# Altium PCB Microphone-Boards_V1.0.PcbDoc (part 2 of 2)
Units mm, origin at the board's own origin, x right, y up, seen from the top; angles counter-clockwise.
Board outline 112 x 88 mm, 2 copper layers (Top Layer, Bottom Layer), stack 1.548 mm thick; 320 components, 194 nets, 1232 pads, 0 vias.
Unrouted connection lines stored in the file: 718.
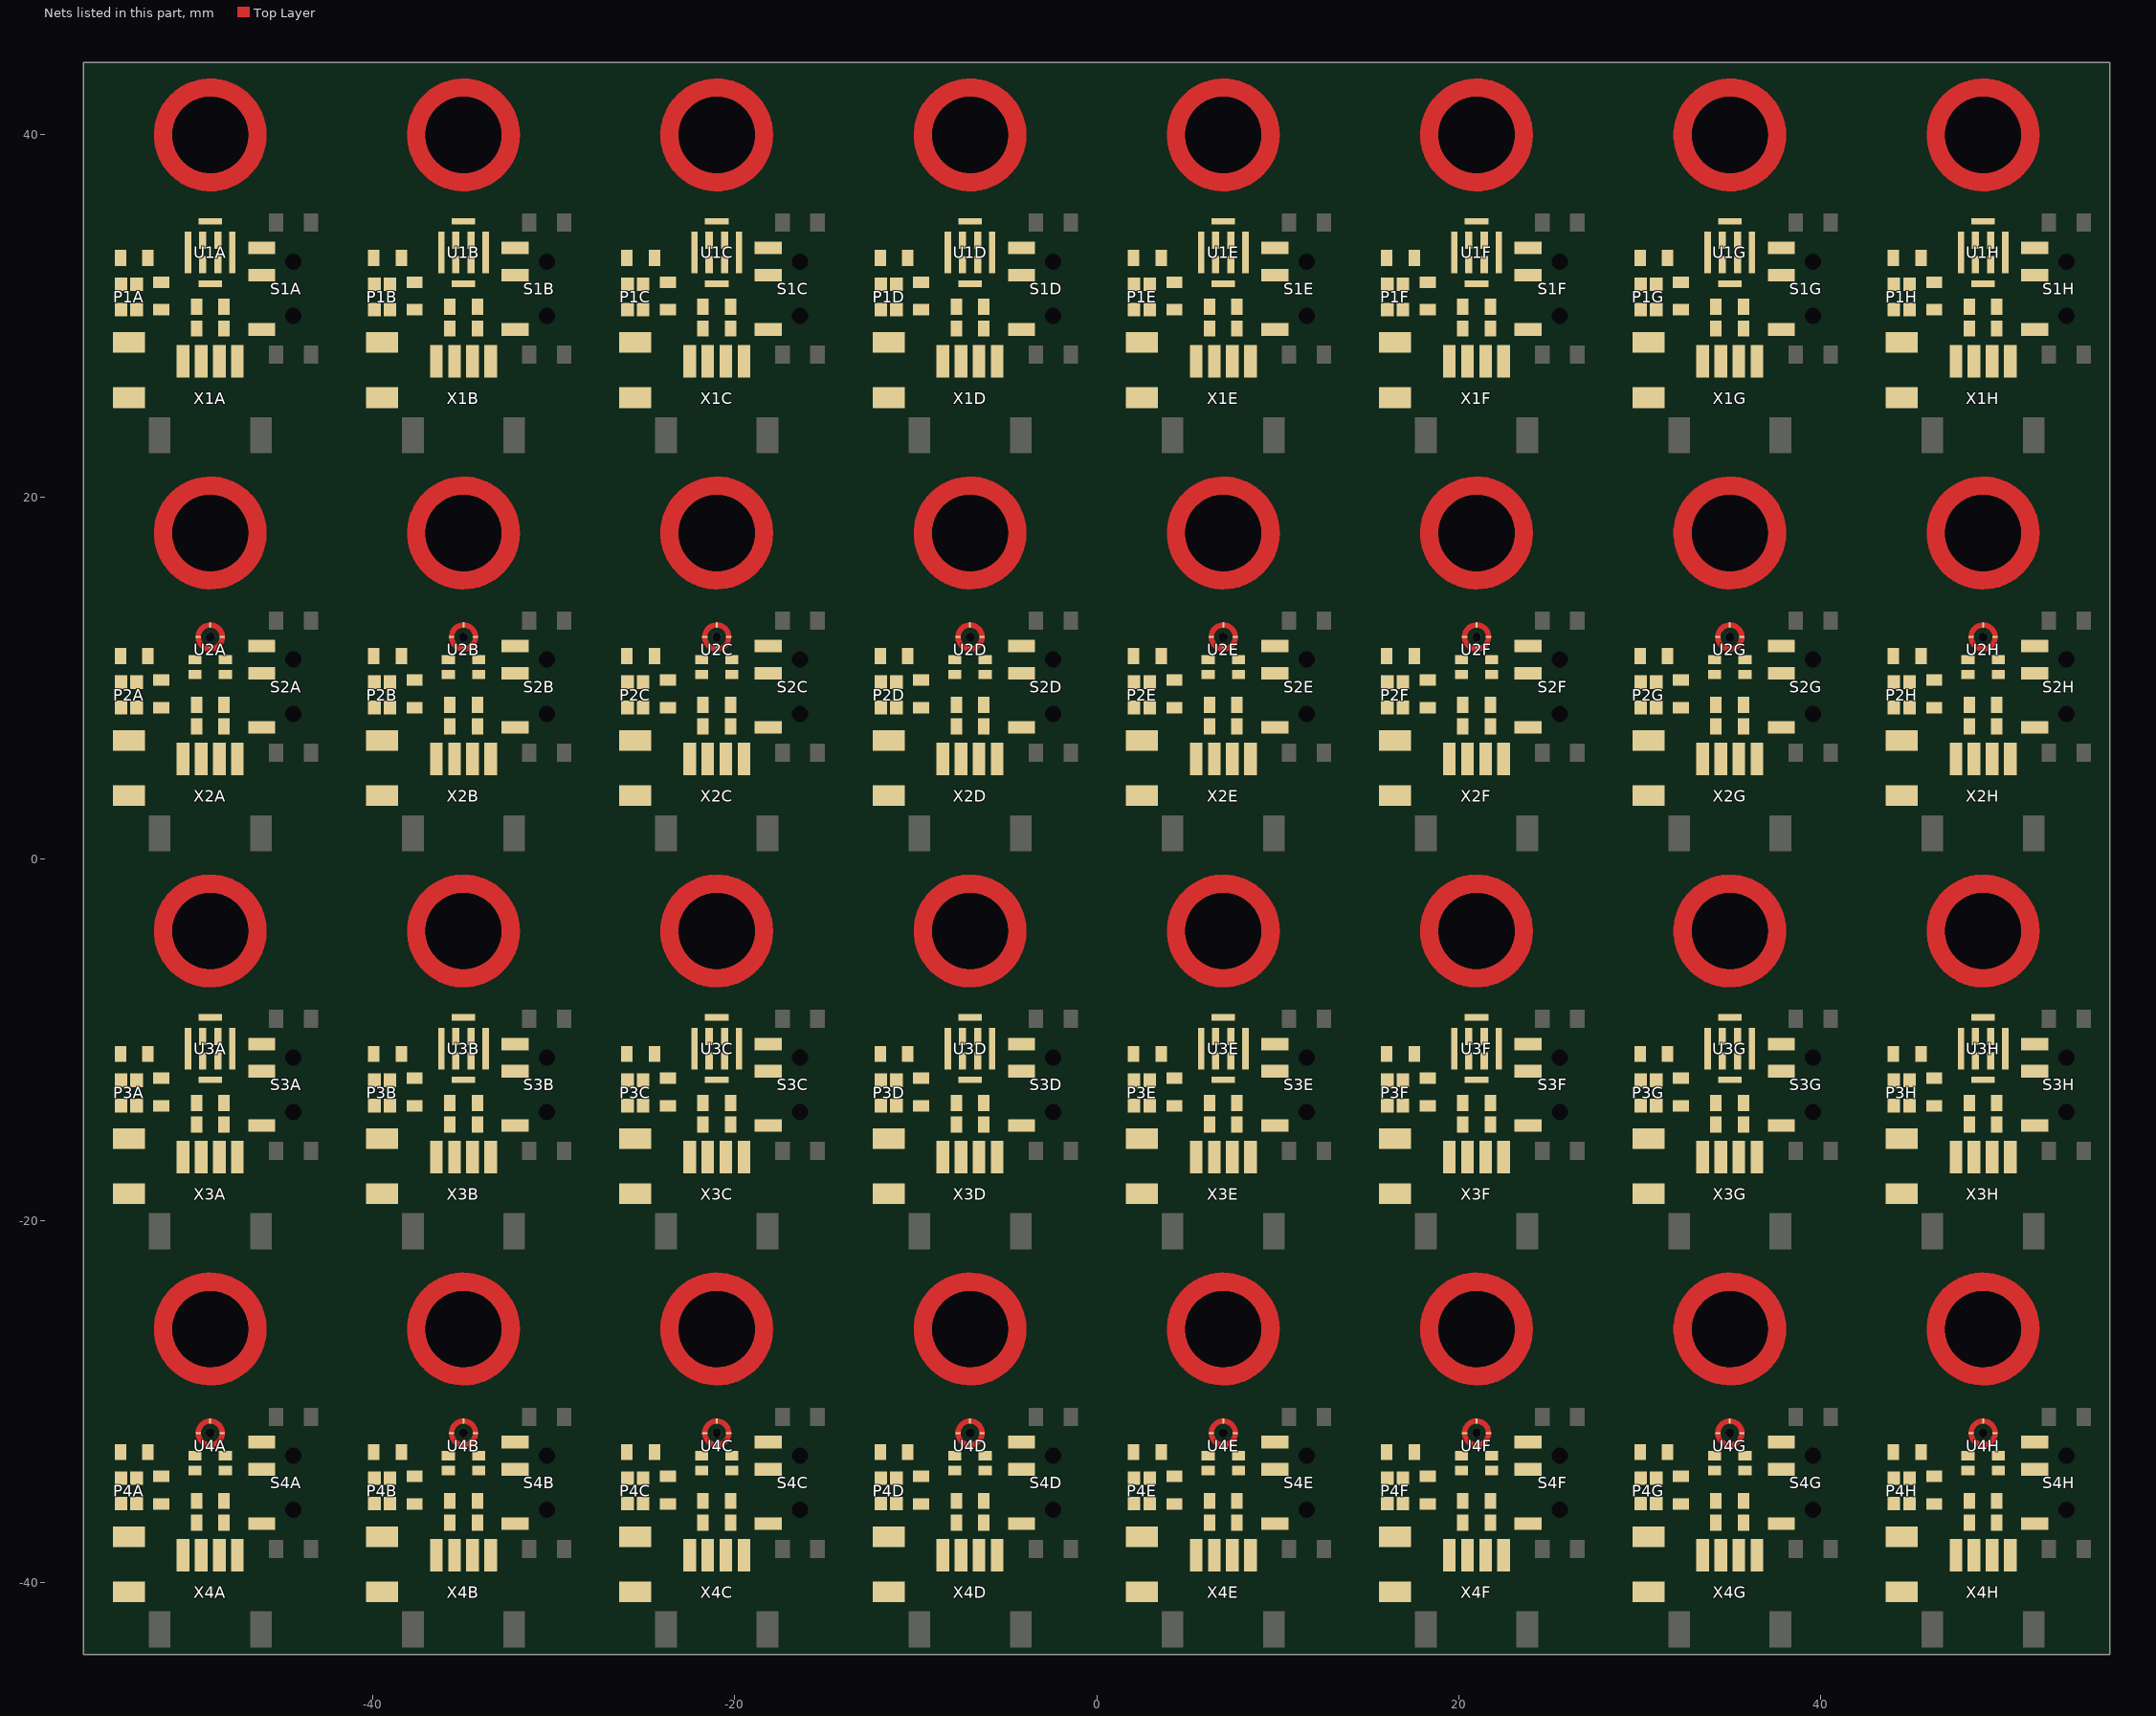
[diagram p2: the nets of this part, all layers, seen from the top]

## Part data
C1A C1B C1C C1D C1E C1F C1G C1H C4A C4B C4C C4D C4E C4F C4G C4H C7A C7B C7C C7D C7E C7F C7G C7H C10A C10B C10C C10D C10E C10F C10G C10H: library part C-CAPACITOR, "CAP-MK", Component Value="10nF 50V", JLC-Parts=C57112, Component Description="Multilayer Ceramic Capacitors", Digikey=445-5662-1-ND, Farnell=2346966, Mouser=77-VJ0603V103ZXAPBC, Unit Price=0.01
C2A C2B C2C C2D C2E C2F C2G C2H C5A C5B C5C C5D C5E C5F C5G C5H C8A C8B C8C C8D C8E C8F C8G C8H C11A C11B C11C C11D C11E C11F C11G C11H: library part "E6 - 100nF", "SMD Ceramic Capacitor E6", Component Value="100nF 50V", JLC-Parts=C14663, Component Description="Multilayer Ceramic Capacitors MLCC", ComponentLink1Description=Datasheet, ComponentLink1URL=https://datasheet.lcsc.com/lcsc/1809301912_YAGEO-CC0603KRX7R9BB104_C14663.pdf, Digikey=445-6899-1-ND, Farnell=2210822, Mouser=810-CGA2B3X7R1H104K, Unit Price=0.01
C3A C3B C3C C3D C3E C3F C3G C3H C6A C6B C6C C6D C6E C6F C6G C6H C9A C9B C9C C9D C9E C9F C9G C9H C12A C12B C12C C12D C12E C12F C12G C12H: library part "E6 - 10uF", "SMD Ceramic Capacitor E6", Component Value="10µF 50V", JLC-Parts=C13585, Component Description="Multilayer Ceramic Capacitors MLCC", ComponentLink1Description=Datasheet, ComponentLink1URL=https://datasheet.lcsc.com/lcsc/1810191219_Samsung-Electro-Mechanics-CL10A106KP8NNNC_C19702.pdf, Digikey=587-3258-1-ND, Farnell=2113070, Mouser=963-LMK107BBJ106MALT, Unit Price=0.01
M1A M1B M1C M1D M1E M1F M1G M1H M2A M2B M2C M2D M2E M2F M2G M2H M3A M3B M3C M3D M3E M3F M3G M3H M4A M4B M4C M4D M4E M4F M4G M4H: library part M-Spacer_M3_3mm, "Solderable Standoff Nut", Component Value="M3 3mm", JLC-Parts=C2915308, Component Description="Solderable Standoff Nut", ComponentLink1Description=Datasheet, ComponentLink1URL=https://datasheet.lcsc.com/lcsc/2112061830_Sinhoo-SMTSO3030CTJ_C2915308.pdf, Mouser=153-SMTSO-M3-3ET, Unit Price=0.05
P1A P1B P1C P1D P1E P1F P1G P1H P2A P2B P2C P2D P2E P2F P2G P2H P3A P3B P3C P3D P3E P3F P3G P3H P4A P4B P4C P4D P4E P4F P4G P4H: library part P-XL-1615SURUWC, "LED Red/White", JLC-Parts=C965837, Component Description="LED Red/White", Component Value=XL-1615SURUWC, ComponentLink1Description=Datasheet, ComponentLink1URL=https://datasheet.lcsc.com/lcsc/2211030000_XINGLIGHT-XL-1615SURUWC_C965837.pdf, Unit Price=0.02
R1A R1B R1C R1D R1E R1F R1G R1H R3A R3B R3C R3D R3E R3F R3G R3H R5A R5B R5C R5D R5E R5F R5G R5H R7A R7B R7C R7D R7E R7F R7G R7H: library part R-RESISTOR, "SMD-Widerstand 1/4W", Component Value="390 (75V, 100mW, 1%)", JLC-Parts=C23151, Component Description="Thick Film Chip Resistor", Digikey=P390HCT-ND, Farnell=2303111, Mouser=667-ERJ-3EKF3900V, Unit Price=0.06
R2A R2B R2C R2D R2E R2F R2G R2H R4A R4B R4C R4D R4E R4F R4G R4H R6A R6B R6C R6D R6E R6F R6G R6H R8A R8B R8C R8D R8E R8F R8G R8H: library part R-RESISTOR, "SMD-Widerstand 1/4W", Component Value="820 (75V, 100mW, 1%)", JLC-Parts=C23253, Component Description="Thick Film Chip Resistor", Digikey=P820HCT-ND, Farnell=2303136, Mouser=667-ERJ-3EKF8200V, Unit Price=0.06
S1A S1B S1C S1D S1E S1F S1G S1H S2A S2B S2C S2D S2E S2F S2G S2H S3A S3B S3C S3D S3E S3F S3G S3H S4A S4B S4C S4D S4E S4F S4G S4H: library part S-PCM12SMTR, "Miniature Slide Switch", Component Value="PCM12SMTR (SPDT)", JLC-Parts=C431540, aliExpress=33002042977, Component Description="Miniature Slide Switch", ComponentLink1Description=Datasheet, ComponentLink1URL=https://datasheet.lcsc.com/lcsc/1912111437_SHOU-HAN-MSK12C02_C431540.pdf, Digikey=401-2016-1-ND, Farnell=9575146, Mouser=611-PCM12SMTR, Unit Price=0.04
U1A U1B U1C U1D U1E U1F U1G U1H: library part U-MP34DT05TR-A, "Digital PDM MEMS Microphone (Top Port)", JLC-Parts=C2688664, Component Description="Digital PDM MEMS Microphone (Top Port)", Component Value=MP34DT05TR-A, ComponentLink1Description=Datasheet, ComponentLink1URL=https://datasheet.lcsc.com/lcsc/2106070037_STMicroelectronics-MP34DT05TR-A_C2688664.pdf, Digikey=497-17809-1-ND, Farnell=2851942, Mouser=511-MP34DT05TR-A, Unit Price=1.50
U2A U2B U2C U2D U2E U2F U2G U2H: library part U-GMA3526H10-B26, "Digital PDM MEMS Microphone (Bottom Port)", JLC-Parts=C498192, Component Description="Digital PDM MEMS Microphone (Bottom Port)", Component Value=GMA3526H10-B26, ComponentLink1Description=Datasheet, ComponentLink1URL=https://datasheet.lcsc.com/lcsc/2004081814_INGHAi-GMA3526H10-B26_C498192.pdf, Digikey=423-1402-1-ND, Mouser=721-SPH0641LU4H-1, Unit Price=1.06
U3A U3B U3C U3D U3E U3F U3G U3H: library part U-GMA4030H11-F26, "Digital PDM MEMS Microphone (Top Port)", JLC-Parts=C498193, Component Description="Digital PDM MEMS Microphone (Top Port)", Component Value=GMA4030H11-F26, ComponentLink1Description=Datasheet, ComponentLink1URL=https://datasheet.lcsc.com/lcsc/2005071903_INGHAi-GMA4030H11-F26_C498193.pdf, Digikey=423-1210-1-ND, Mouser=721-SPK0415HM4H-B-7, Unit Price=1.11
U4A U4B U4C U4D U4E U4F U4G U4H: library part U-SD18OB261-060, "Digital PDM MEMS Microphone (Bottom Port)", JLC-Parts=C2895290, Component Description="Digital PDM MEMS Microphone (Bottom Port)", Component Value=SD18OB261-060, ComponentLink1Description=Datasheet, ComponentLink1URL=https://datasheet.lcsc.com/lcsc/2208241200_Goertek-SD18OB261-060_C2895290.pdf, Digikey=4719-SD18OB261-050DKR-ND, Unit Price=0.61
X1A X1B X1C X1D X1E X1F X1G X1H X2A X2B X2C X2D X2E X2F X2G X2H X3A X3B X3C X3D X3E X3F X3G X3H X4A X4B X4C X4D X4E X4F X4G X4H: library part "X-Stiftleiste (4-Fach)", "Wire To Board Connector (1x4P 1.0mm)", JLC-Parts=C2905006, Component Description="Wire To Board Connector (1x4P 1.0mm)", Component Value=1.0-4PWB, ComponentLink1Description=Datasheet, ComponentLink1URL=https://datasheet.lcsc.com/lcsc/2111080930_DEALON-1-0-4PWB_C2905006.pdf, Digikey=455-SM04B-SRSS-TBCT-ND, Farnell=1830839, Unit Price=0.03

## Nets (pads, with @x,y where several pads share a name; then routed paths per layer and width w, separated by ;. In a path a pad name is that pad's centre, name@x,y a point inside that pad or via, vN(x,y) a via of type N, cw(c..) or ccw(c..) an arc to the next point about the centre after c; other vN are vias at no path point)
3V3: C1A.2 C1B.2 C1C.2 C1D.2 C1E.2 C1F.2 C1G.2 C1H.2 C2A.2 C2B.2 C2C.2 C2D.2 C2E.2 C2F.2 C2G.2 C2H.2 C3A.2 C3B.2 C3C.2 C3D.2 C3E.2 C3F.2 C3G.2 C3H.2 C4A.2 C4B.2 C4C.2 C4D.2 C4E.2 C4F.2 C4G.2 C4H.2 C5A.2 C5B.2 C5C.2 C5D.2 C5E.2 C5F.2 C5G.2 C5H.2 C6A.2 C6B.2 C6C.2 C6D.2 C6E.2 C6F.2 C6G.2 C6H.2 C7A.2 C7B.2 C7C.2 C7D.2 C7E.2 C7F.2 C7G.2 C7H.2 C8A.2 C8B.2 C8C.2 C8D.2 C8E.2 C8F.2 C8G.2 C8H.2 C9A.2 C9B.2 C9C.2 C9D.2 C9E.2 C9F.2 C9G.2 C9H.2 C10A.2 C10B.2 C10C.2 C10D.2 C10E.2 C10F.2 C10G.2 C10H.2 C11A.2 C11B.2 C11C.2 C11D.2 C11E.2 C11F.2 C11G.2 C11H.2 C12A.2 C12B.2 C12C.2 C12D.2 C12E.2 C12F.2 C12G.2 C12H.2 P1A.4 P1B.4 P1C.4 P1D.4 P1E.4 P1F.4 P1G.4 P1H.4 P2A.4 P2B.4 P2C.4 P2D.4 P2E.4 P2F.4 P2G.4 P2H.4 P3A.4 P3B.4 P3C.4 P3D.4 P3E.4 P3F.4 P3G.4 P3H.4 P4A.4 P4B.4 P4C.4 P4D.4 P4E.4 P4F.4 P4G.4 P4H.4 S1A.1 S1B.1 S1C.1 S1D.1 S1E.1 S1F.1 S1G.1 S1H.1 S2A.1 S2B.1 S2C.1 S2D.1 S2E.1 S2F.1 S2G.1 S2H.1 S3A.1 S3B.1 S3C.1 S3D.1 S3E.1 S3F.1 S3G.1 S3H.1 S4A.1 S4B.1 S4C.1 S4D.1 S4E.1 S4F.1 S4G.1 S4H.1 U1A.1 U1B.1 U1C.1 U1D.1 U1E.1 U1F.1 U1G.1 U1H.1 U2A.5 U2B.5 U2C.5 U2D.5 U2E.5 U2F.5 U2G.5 U2H.5 U3A.1 U3B.1 U3C.1 U3D.1 U3E.1 U3F.1 U3G.1 U3H.1 U4A.5 U4B.5 U4C.5 U4D.5 U4E.5 U4F.5 U4G.5 U4H.5 X1A.2 X1B.2 X1C.2 X1D.2 X1E.2 X1F.2 X1G.2 X1H.2 X2A.2 X2B.2 X2C.2 X2D.2 X2E.2 X2F.2 X2G.2 X2H.2 X3A.2 X3B.2 X3C.2 X3D.2 X3E.2 X3F.2 X3G.2 X3H.2 X4A.2 X4B.2 X4C.2 X4D.2 X4E.2 X4F.2 X4G.2 X4H.2
GND: C1A.1 C1B.1 C1C.1 C1D.1 C1E.1 C1F.1 C1G.1 C1H.1 C2A.1 C2B.1 C2C.1 C2D.1 C2E.1 C2F.1 C2G.1 C2H.1 C3A.1 C3B.1 C3C.1 C3D.1 C3E.1 C3F.1 C3G.1 C3H.1 C4A.1 C4B.1 C4C.1 C4D.1 C4E.1 C4F.1 C4G.1 C4H.1 C5A.1 C5B.1 C5C.1 C5D.1 C5E.1 C5F.1 C5G.1 C5H.1 C6A.1 C6B.1 C6C.1 C6D.1 C6E.1 C6F.1 C6G.1 C6H.1 C7A.1 C7B.1 C7C.1 C7D.1 C7E.1 C7F.1 C7G.1 C7H.1 C8A.1 C8B.1 C8C.1 C8D.1 C8E.1 C8F.1 C8G.1 C8H.1 C9A.1 C9B.1 C9C.1 C9D.1 C9E.1 C9F.1 C9G.1 C9H.1 C10A.1 C10B.1 C10C.1 C10D.1 C10E.1 C10F.1 C10G.1 C10H.1 C11A.1 C11B.1 C11C.1 C11D.1 C11E.1 C11F.1 C11G.1 C11H.1 C12A.1 C12B.1 C12C.1 C12D.1 C12E.1 C12F.1 C12G.1 C12H.1 P1A.1 P1B.1 P1C.1 P1D.1 P1E.1 P1F.1 P1G.1 P1H.1 P2A.1 P2B.1 P2C.1 P2D.1 P2E.1 P2F.1 P2G.1 P2H.1 P3A.1 P3B.1 P3C.1 P3D.1 P3E.1 P3F.1 P3G.1 P3H.1 P4A.1 P4B.1 P4C.1 P4D.1 P4E.1 P4F.1 P4G.1 P4H.1 S1A.3 S1B.3 S1C.3 S1D.3 S1E.3 S1F.3 S1G.3 S1H.3 S2A.3 S2B.3 S2C.3 S2D.3 S2E.3 S2F.3 S2G.3 S2H.3 S3A.3 S3B.3 S3C.3 S3D.3 S3E.3 S3F.3 S3G.3 S3H.3 S4A.3 S4B.3 S4C.3 S4D.3 S4E.3 S4F.3 S4G.3 S4H.3 U1A.5 U1B.5 U1C.5 U1D.5 U1E.5 U1F.5 U1G.5 U1H.5 U2A.3 U2B.3 U2C.3 U2D.3 U2E.3 U2F.3 U2G.3 U2H.3 U3A.5 U3B.5 U3C.5 U3D.5 U3E.5 U3F.5 U3G.5 U3H.5 U4A.3 U4B.3 U4C.3 U4D.3 U4E.3 U4F.3 U4G.3 U4H.3 X1A.1 X1B.1 X1C.1 X1D.1 X1E.1 X1F.1 X1G.1 X1H.1 X2A.1 X2B.1 X2C.1 X2D.1 X2E.1 X2F.1 X2G.1 X2H.1 X3A.1 X3B.1 X3C.1 X3D.1 X3E.1 X3F.1 X3G.1 X3H.1 X4A.1 X4B.1 X4C.1 X4D.1 X4E.1 X4F.1 X4G.1 X4H.1
NetM1A_1: M1A.1
NetM1B_1: M1B.1
NetM1C_1: M1C.1
NetM1D_1: M1D.1
NetM1E_1: M1E.1
NetM1F_1: M1F.1
NetM1G_1: M1G.1
NetM1H_1: M1H.1
NetM2A_1: M2A.1
NetM2B_1: M2B.1
NetM2C_1: M2C.1
NetM2D_1: M2D.1
NetM2E_1: M2E.1
NetM2F_1: M2F.1
NetM2G_1: M2G.1
NetM2H_1: M2H.1
NetM3A_1: M3A.1
NetM3B_1: M3B.1
NetM3C_1: M3C.1
NetM3D_1: M3D.1
NetM3E_1: M3E.1
NetM3F_1: M3F.1
NetM3G_1: M3G.1
NetM3H_1: M3H.1
NetM4A_1: M4A.1
NetM4B_1: M4B.1
NetM4C_1: M4C.1
NetM4D_1: M4D.1
NetM4E_1: M4E.1
NetM4F_1: M4F.1
NetM4G_1: M4G.1
NetM4H_1: M4H.1
NetP1A_2: P1A.2 R2A.2
NetP1A_3: P1A.3 R1A.2
NetP1B_2: P1B.2 R2B.2
NetP1B_3: P1B.3 R1B.2
NetP1C_2: P1C.2 R2C.2
NetP1C_3: P1C.3 R1C.2
NetP1D_2: P1D.2 R2D.2
NetP1D_3: P1D.3 R1D.2
NetP1E_2: P1E.2 R2E.2
NetP1E_3: P1E.3 R1E.2
NetP1F_2: P1F.2 R2F.2
NetP1F_3: P1F.3 R1F.2
NetP1G_2: P1G.2 R2G.2
NetP1G_3: P1G.3 R1G.2
NetP1H_2: P1H.2 R2H.2
NetP1H_3: P1H.3 R1H.2
NetP2A_2: P2A.2 R4A.2
NetP2A_3: P2A.3 R3A.2
NetP2B_2: P2B.2 R4B.2
NetP2B_3: P2B.3 R3B.2
NetP2C_2: P2C.2 R4C.2
NetP2C_3: P2C.3 R3C.2
NetP2D_2: P2D.2 R4D.2
NetP2D_3: P2D.3 R3D.2
NetP2E_2: P2E.2 R4E.2
NetP2E_3: P2E.3 R3E.2
NetP2F_2: P2F.2 R4F.2
NetP2F_3: P2F.3 R3F.2
NetP2G_2: P2G.2 R4G.2
NetP2G_3: P2G.3 R3G.2
NetP2H_2: P2H.2 R4H.2
NetP2H_3: P2H.3 R3H.2
NetP3A_2: P3A.2 R6A.2
NetP3A_3: P3A.3 R5A.2
NetP3B_2: P3B.2 R6B.2
NetP3B_3: P3B.3 R5B.2
NetP3C_2: P3C.2 R6C.2
NetP3C_3: P3C.3 R5C.2
NetP3D_2: P3D.2 R6D.2
NetP3D_3: P3D.3 R5D.2
NetP3E_2: P3E.2 R6E.2
NetP3E_3: P3E.3 R5E.2
NetP3F_2: P3F.2 R6F.2
NetP3F_3: P3F.3 R5F.2
NetP3G_2: P3G.2 R6G.2
NetP3G_3: P3G.3 R5G.2
NetP3H_2: P3H.2 R6H.2
NetP3H_3: P3H.3 R5H.2
NetP4A_2: P4A.2 R8A.2
NetP4A_3: P4A.3 R7A.2
NetP4B_2: P4B.2 R8B.2
NetP4B_3: P4B.3 R7B.2
NetP4C_2: P4C.2 R8C.2
NetP4C_3: P4C.3 R7C.2
NetP4D_2: P4D.2 R8D.2
NetP4D_3: P4D.3 R7D.2
NetP4E_2: P4E.2 R8E.2
NetP4E_3: P4E.3 R7E.2
NetP4F_2: P4F.2 R8F.2
NetP4F_3: P4F.3 R7F.2
NetP4G_2: P4G.2 R8G.2
NetP4G_3: P4G.3 R7G.2
NetP4H_2: P4H.2 R8H.2
NetP4H_3: P4H.3 R7H.2
NetR1A_1: R1A.1 R2A.1 S1A.2 U1A.2
NetR1B_1: R1B.1 R2B.1 S1B.2 U1B.2
NetR1C_1: R1C.1 R2C.1 S1C.2 U1C.2
NetR1D_1: R1D.1 R2D.1 S1D.2 U1D.2
NetR1E_1: R1E.1 R2E.1 S1E.2 U1E.2
NetR1F_1: R1F.1 R2F.1 S1F.2 U1F.2
NetR1G_1: R1G.1 R2G.1 S1G.2 U1G.2
NetR1H_1: R1H.1 R2H.1 S1H.2 U1H.2
NetR3A_1: R3A.1 R4A.1 S2A.2 U2A.2
NetR3B_1: R3B.1 R4B.1 S2B.2 U2B.2
NetR3C_1: R3C.1 R4C.1 S2C.2 U2C.2
NetR3D_1: R3D.1 R4D.1 S2D.2 U2D.2
NetR3E_1: R3E.1 R4E.1 S2E.2 U2E.2
NetR3F_1: R3F.1 R4F.1 S2F.2 U2F.2
NetR3G_1: R3G.1 R4G.1 S2G.2 U2G.2
NetR3H_1: R3H.1 R4H.1 S2H.2 U2H.2
NetR5A_1: R5A.1 R6A.1 S3A.2 U3A.2
NetR5B_1: R5B.1 R6B.1 S3B.2 U3B.2
NetR5C_1: R5C.1 R6C.1 S3C.2 U3C.2
NetR5D_1: R5D.1 R6D.1 S3D.2 U3D.2
NetR5E_1: R5E.1 R6E.1 S3E.2 U3E.2
NetR5F_1: R5F.1 R6F.1 S3F.2 U3F.2
NetR5G_1: R5G.1 R6G.1 S3G.2 U3G.2
NetR5H_1: R5H.1 R6H.1 S3H.2 U3H.2
NetR7A_1: R7A.1 R8A.1 S4A.2 U4A.2
NetR7B_1: R7B.1 R8B.1 S4B.2 U4B.2
NetR7C_1: R7C.1 R8C.1 S4C.2 U4C.2
NetR7D_1: R7D.1 R8D.1 S4D.2 U4D.2
NetR7E_1: R7E.1 R8E.1 S4E.2 U4E.2
NetR7F_1: R7F.1 R8F.1 S4F.2 U4F.2
NetR7G_1: R7G.1 R8G.1 S4G.2 U4G.2
NetR7H_1: R7H.1 R8H.1 S4H.2 U4H.2
NetU1A_3: U1A.3 X1A.4
NetU1A_4: U1A.4 X1A.3
NetU1B_3: U1B.3 X1B.4
NetU1B_4: U1B.4 X1B.3
NetU1C_3: U1C.3 X1C.4
NetU1C_4: U1C.4 X1C.3
NetU1D_3: U1D.3 X1D.4
NetU1D_4: U1D.4 X1D.3
NetU1E_3: U1E.3 X1E.4
NetU1E_4: U1E.4 X1E.3
NetU1F_3: U1F.3 X1F.4
NetU1F_4: U1F.4 X1F.3
NetU1G_3: U1G.3 X1G.4
NetU1G_4: U1G.4 X1G.3
NetU1H_3: U1H.3 X1H.4
NetU1H_4: U1H.4 X1H.3
NetU2A_1: U2A.1 X2A.3
NetU2A_4: U2A.4 X2A.4
NetU2B_1: U2B.1 X2B.3
NetU2B_4: U2B.4 X2B.4
NetU2C_1: U2C.1 X2C.3
NetU2C_4: U2C.4 X2C.4
NetU2D_1: U2D.1 X2D.3
NetU2D_4: U2D.4 X2D.4
NetU2E_1: U2E.1 X2E.3
NetU2E_4: U2E.4 X2E.4
NetU2F_1: U2F.1 X2F.3
NetU2F_4: U2F.4 X2F.4
NetU2G_1: U2G.1 X2G.3
NetU2G_4: U2G.4 X2G.4
NetU2H_1: U2H.1 X2H.3
NetU2H_4: U2H.4 X2H.4
NetU3A_3: U3A.3 X3A.4
NetU3A_4: U3A.4 X3A.3
NetU3B_3: U3B.3 X3B.4
NetU3B_4: U3B.4 X3B.3
NetU3C_3: U3C.3 X3C.4
NetU3C_4: U3C.4 X3C.3
NetU3D_3: U3D.3 X3D.4
NetU3D_4: U3D.4 X3D.3
NetU3E_3: U3E.3 X3E.4
NetU3E_4: U3E.4 X3E.3
NetU3F_3: U3F.3 X3F.4
NetU3F_4: U3F.4 X3F.3
NetU3G_3: U3G.3 X3G.4
NetU3G_4: U3G.4 X3G.3
NetU3H_3: U3H.3 X3H.4
NetU3H_4: U3H.4 X3H.3
NetU4A_1: U4A.1 X4A.3
NetU4A_4: U4A.4 X4A.4
NetU4B_1: U4B.1 X4B.3
NetU4B_4: U4B.4 X4B.4
NetU4C_1: U4C.1 X4C.3
NetU4C_4: U4C.4 X4C.4
NetU4D_1: U4D.1 X4D.3
NetU4D_4: U4D.4 X4D.4
NetU4E_1: U4E.1 X4E.3
NetU4E_4: U4E.4 X4E.4
NetU4F_1: U4F.1 X4F.3
NetU4F_4: U4F.4 X4F.4
NetU4G_1: U4G.1 X4G.3
NetU4G_4: U4G.4 X4G.4
NetU4H_1: U4H.1 X4H.3
NetU4H_4: U4H.4 X4H.4
pads on no net: S1A.NC S1B.NC S1C.NC S1D.NC S1E.NC S1F.NC S1G.NC S1H.NC S2A.NC S2B.NC S2C.NC S2D.NC S2E.NC S2F.NC S2G.NC S2H.NC S3A.NC S3B.NC S3C.NC S3D.NC S3E.NC S3F.NC S3G.NC S3H.NC S4A.NC S4B.NC S4C.NC S4D.NC S4E.NC S4F.NC S4G.NC S4H.NC U2A. U2B. U2C. U2D. U2E. U2F. U2G. U2H. U4A. U4B. U4C. U4D. U4E. U4F. U4G. U4H. X1A.NC X1B.NC X1C.NC X1D.NC X1E.NC X1F.NC X1G.NC X1H.NC X2A.NC X2B.NC X2C.NC X2D.NC X2E.NC X2F.NC X2G.NC X2H.NC X3A.NC X3B.NC X3C.NC X3D.NC X3E.NC X3F.NC X3G.NC X3H.NC X4A.NC X4B.NC X4C.NC X4D.NC X4E.NC X4F.NC X4G.NC X4H.NC

## Silkscreen, mask and mechanical layers (free items; w line width, h text height)
Top Overlay:
  lines w0.254: -56,-22 -42,-22 ; -56,0 -42,0 ; -56,22 -42,22 ; -42,-44 -42,-22 ; -42,44 -42,22 ; -28,-44 -28,-22 ; -28,44 -28,22 ; -14,-44 -14,-22 ; -14,44 -14,22 ; 0,-44 0,-22 ; 0,44 0,22 ; 14,-44 14,-22 ; 14,44 14,22 ; 28,-44 28,-22 ; 28,44 28,22 ; 42,-44 42,-22 ; 42,44 42,22 ; 56,-22 42,-22 ; 56,0 42,0 ; 56,22 42,22 ; -42,-22 -28,-22 ; -42,-22 -42,0 ; -42,0 -28,0 ; -42,0 -42,22 ; -42,22 -28,22 ; -28,-22 -14,-22 ; -28,-22 -28,0 ; -28,0 -14,0 ; -28,0 -28,22 ; -28,22 -14,22 ; -14,-22 -14,0 ; -14,-22 0,-22 ; -14,0 0,0 ; -14,0 -14,22 ; -14,22 0,22 ; 0,-22 0,0 ; 0,-22 14,-22 ; 0,0 14,0 ; 0,0 0,22 ; 0,22 14,22 ; 14,-22 14,0 ; 14,-22 28,-22 ; 14,0 28,0 ; 14,0 14,22 ; 14,22 28,22 ; 28,-22 42,-22 ; 28,-22 28,0 ; 28,0 42,0 ; 28,0 28,22 ; 28,22 42,22 ; 42,-22 42,0 ; 42,0 42,22
Bottom Overlay:
  lines w0.254: -56,-22 -42,-22 ; -56,0 -42,0 ; -56,22 -42,22 ; -42,-44 -42,-22 ; -42,44 -42,22 ; -28,-44 -28,-22 ; -28,44 -28,22 ; -14,-44 -14,-22 ; -14,44 -14,22 ; 0,-44 0,-22 ; 0,44 0,22 ; 14,-44 14,-22 ; 14,44 14,22 ; 28,-44 28,-22 ; 28,44 28,22 ; 42,-44 42,-22 ; 42,44 42,22 ; 56,-22 42,-22 ; 56,0 42,0 ; 56,22 42,22 ; -42,-22 -42,0 ; -42,-22 -28,-22 ; -42,0 -42,22 ; -42,0 -28,0 ; -42,22 -28,22 ; -28,-22 -28,0 ; -28,-22 -14,-22 ; -28,0 -28,22 ; -28,0 -14,0 ; -28,22 -14,22 ; -14,-22 0,-22 ; -14,-22 -14,0 ; -14,0 -14,22 ; -14,0 0,0 ; -14,22 0,22 ; 0,-22 14,-22 ; 0,-22 0,0 ; 0,0 0,22 ; 0,0 14,0 ; 0,22 14,22 ; 14,-22 28,-22 ; 14,-22 14,0 ; 14,0 28,0 ; 14,0 14,22 ; 14,22 28,22 ; 28,-22 28,0 ; 28,-22 42,-22 ; 28,0 28,22 ; 28,0 42,0 ; 28,22 42,22 ; 42,-22 42,0 ; 42,0 42,22
Mechanical 1:
  lines w0.254: -56,-44 -42,-44 -28,-44 -14,-44 0,-44 14,-44 28,-44 42,-44 56,-44 56,-22 56,0 56,22 56,44 42,44 28,44 14,44 0,44 -14,44 -28,44 -42,44 -56,44 -56,22 -56,0 -56,-22 -56,-44
Mechanical 15:
  lines w0.127: -141.08,-55.74 -136,-55.74 ; -141.08,-7.48 -136,-7.48 ; -141.08,40.78 -136,40.78 ; -136,-91.3 -21.7,-91.3 ; -136,-83.68 -21.7,-83.68 ; -113.14,-98.92 -113.14,-83.68 ; -68.055,-104 -68.055,-98.92 ; -68.055,83.96 -68.055,89.04 ; -59.8,-98.92 -59.8,-83.68 -59.8,-68.44 ; -59.8,-76.06 -21.7,-76.06 ; 4.97,-104 4.97,-98.92 ; 4.97,83.96 4.97,89.04 ; 13.86,-98.92 -21.7,-98.92 ; 77.995,-104 77.995,-98.92 ; 77.995,83.96 77.995,89.04 ; 136.02,-56 141.1,-56 ; 136.02,-7 141.1,-7 ; 136.02,41 141.1,41 ; -136,-98.92 136.02,-99 136.02,84 -136,83.96 -136,-98.92 ; -136,-98.92 -21.7,-98.92 ; -136,-98.92 -136,-68.44 -59.8,-68.44 ; -59.8,-68.44 -21.7,-68.44 -21.7,-98.92 ; -141.08,-104 141.02,-104 141.02,89 -141.08,89.04 -141.08,-104
  text "4" at -103.92,85.611 h1.78
  text "3" at -31.022,85.611 h1.78
  text "2" at 42.13,85.611 h1.78
  text "1" at 114.774,85.611 h1.78
  text "A" at 140.02,63 h1.78
  text "A" at -137.905,62.599 h1.78
  text "B" at 139.02,15 h1.78
  text "B" at -137.905,14.542 h1.78
  text "C" at -137.905,-33.972 h1.78
  text "C" at 139.02,-34 h1.78
  text "TITLE:" at -61.07,-70.98 h1.14
  text "ENGINEER:" at -22.97,-70.98 h1.14
  text "Florian Baumgartner" at -24.466,-74.823 h1.78
  text "PCB DESIGNER:" at -22.97,-78.473 h1.14
  text "Microphone-Boards" at -61.691,-79.065 h4
  text "D" at -137.905,-81.978 h1.78
  text "D" at 139.02,-82 h1.78
  text "Florian Baumgartner" at -24.466,-82.443 h1.78
  text "REV:" at -114.41,-86.22 h1.14
  text "PART NO.:" at -61.07,-86.22 h1.14
  text "DATE:" at -22.97,-86.22 h1.14
  text "08.10.2023" at -24.24,-89.268 h1.78
  text "V1.0" at -115.271,-90.063 h1.78
  text "1/1" at -61.296,-90.063 h1.78
  text "SCALE:" at -114.41,-93.84 h1.14
  text "DWG NO:" at -61.07,-93.84 h1.14
  text "FILE NAME:" at -22.97,-93.84 h1.14
  text "Microphone-Boards_V1.0.PcbDoc" at -24.466,-97.048 h1.32
  text "1:1" at -115.271,-97.683 h1.78
  text "1/1" at -61.296,-97.683 h1.78
  text "4" at -103.92,-102.349 h1.78
  text "3" at -31.022,-102.349 h1.78
  text "2" at 42.13,-102.349 h1.78
  text "1" at 114.774,-102.349 h1.78
Mechanical 16:
  lines w0.127: -141.08,-56 -136,-56 ; -141.08,-7 -136,-7 ; -141.08,41 -136,41 ; -77.975,-104 -77.975,-98.92 ; -77.975,83.96 -77.975,89.04 ; -13.84,-98.92 21.72,-98.92 ; -4.95,-104 -4.95,-98.92 ; -4.95,83.96 -4.95,89.04 ; 21.72,-91.3 136.02,-91.3 ; 21.72,-83.68 136.02,-83.68 ; 21.72,-76.06 59.82,-76.06 ; 59.82,-98.92 59.82,-83.68 59.82,-68.44 ; 68.075,-104 68.075,-98.92 ; 68.075,83.96 68.075,89.04 ; 113.16,-98.92 113.16,-83.68 ; 136.02,-55.74 141.1,-55.74 ; 136.02,-7.48 141.1,-7.48 ; 136.02,40.78 141.1,40.78 ; 21.72,-98.92 21.72,-68.44 59.82,-68.44 ; 21.72,-98.92 136.02,-98.92 ; 59.82,-68.44 136.02,-68.44 136.02,-98.92 ; 136.02,-98.92 136.02,83.96 -136,84 -136,-99 136.02,-98.92 ; -141,-104 -141,89 141.1,89.04 141.1,-104 -141,-104
  text "1" at -114.754,85.611 h1.78
  text "2" at -42.11,85.611 h1.78
  text "3" at 31.042,85.611 h1.78
  text "4" at 103.94,85.611 h1.78
  text "A" at -140,63 h1.78
  text "A" at 137.925,62.599 h1.78
  text "B" at -139,15 h1.78
  text "B" at 137.925,14.542 h1.78
  text "C" at 137.925,-33.972 h1.78
  text "C" at -139,-34 h1.78
  text "ENGINEER:" at 22.99,-70.98 h1.14
  text "TITLE:" at 61.09,-70.98 h1.14
  text "Florian Baumgartner" at 24.034,-74.823 h1.78
  text "PCB DESIGNER:" at 22.99,-78.473 h1.14
  text "Microphone-Boards" at 61.499,-79.065 h4
  text "D" at 137.925,-81.978 h1.78
  text "D" at -139,-82 h1.78
  text "Florian Baumgartner" at 24.034,-82.443 h1.78
  text "DATE:" at 22.99,-86.22 h1.14
  text "PART NO.:" at 61.09,-86.22 h1.14
  text "REV:" at 114.43,-86.22 h1.14
  text "08.10.2023" at 24.26,-89.268 h1.78
  text "1/1" at 60.864,-90.063 h1.78
  text "V1.0" at 114.204,-90.063 h1.78
  text "FILE NAME:" at 22.99,-93.84 h1.14
  text "DWG NO:" at 61.09,-93.84 h1.14
  text "SCALE:" at 114.43,-93.84 h1.14
  text "Microphone-Boards_V1.0.PcbDoc" at 24.034,-97.048 h1.32
  text "1/1" at 60.864,-97.683 h1.78
  text "1:1" at 114.204,-97.683 h1.78
  text "1" at -114.754,-102.349 h1.78
  text "2" at -42.11,-102.349 h1.78
  text "3" at 31.042,-102.349 h1.78
  text "4" at 103.94,-102.349 h1.78